# EAGLE board Qwiic Solid State Relay-Panel (EAGLE 9.6.0)
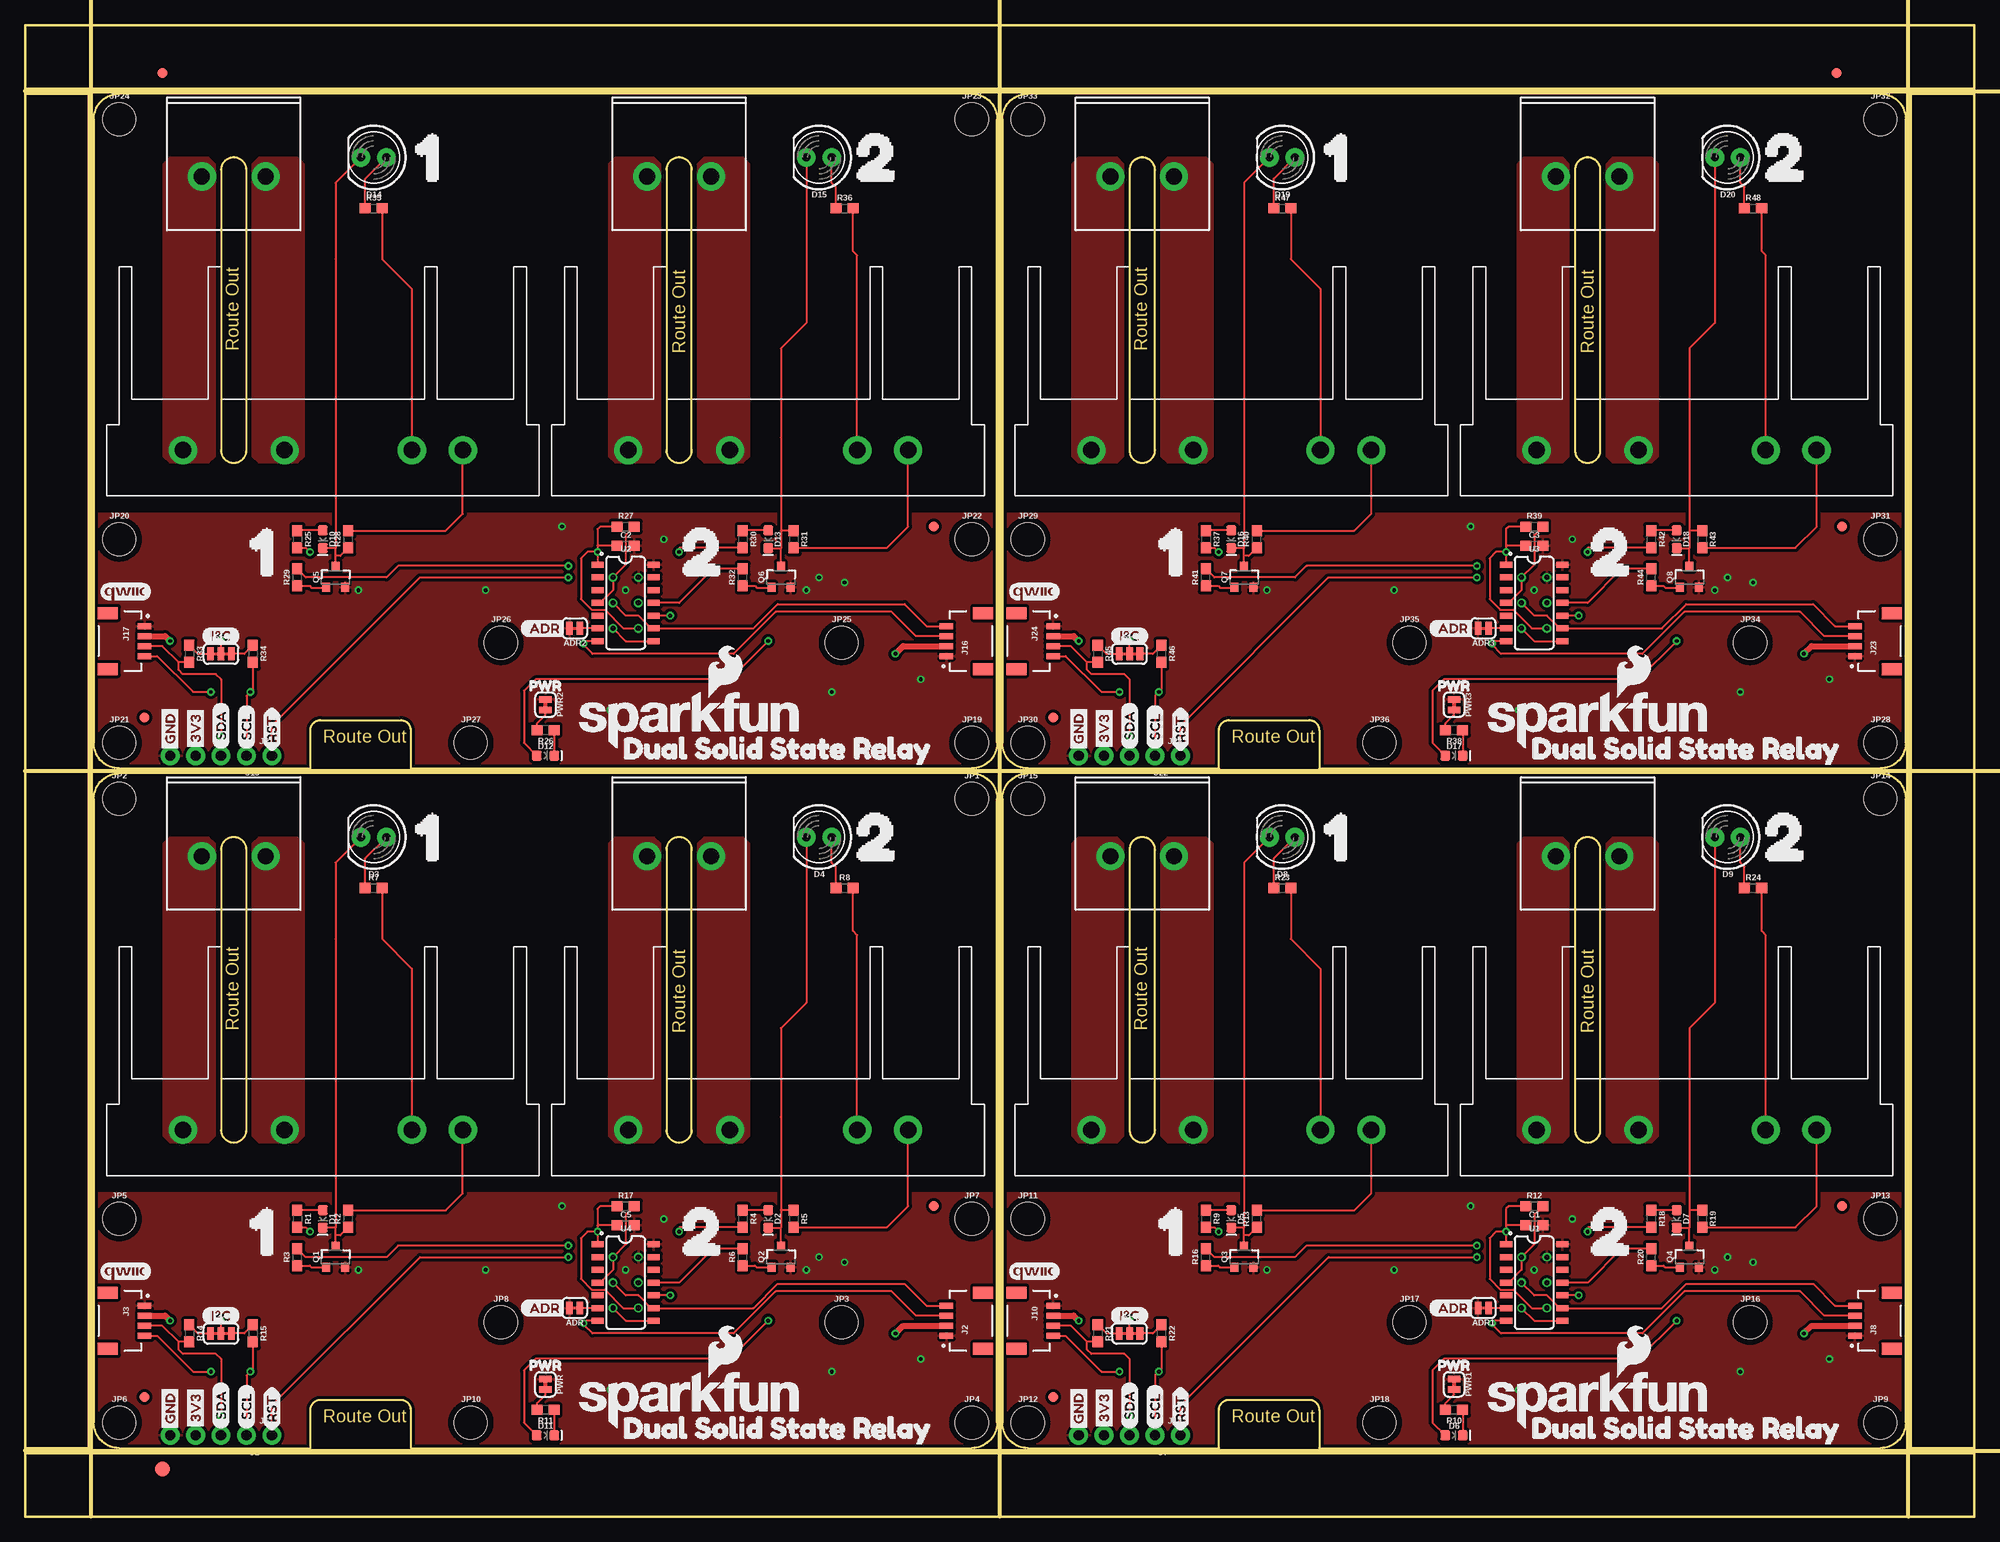
[diagram p0: board, top side]
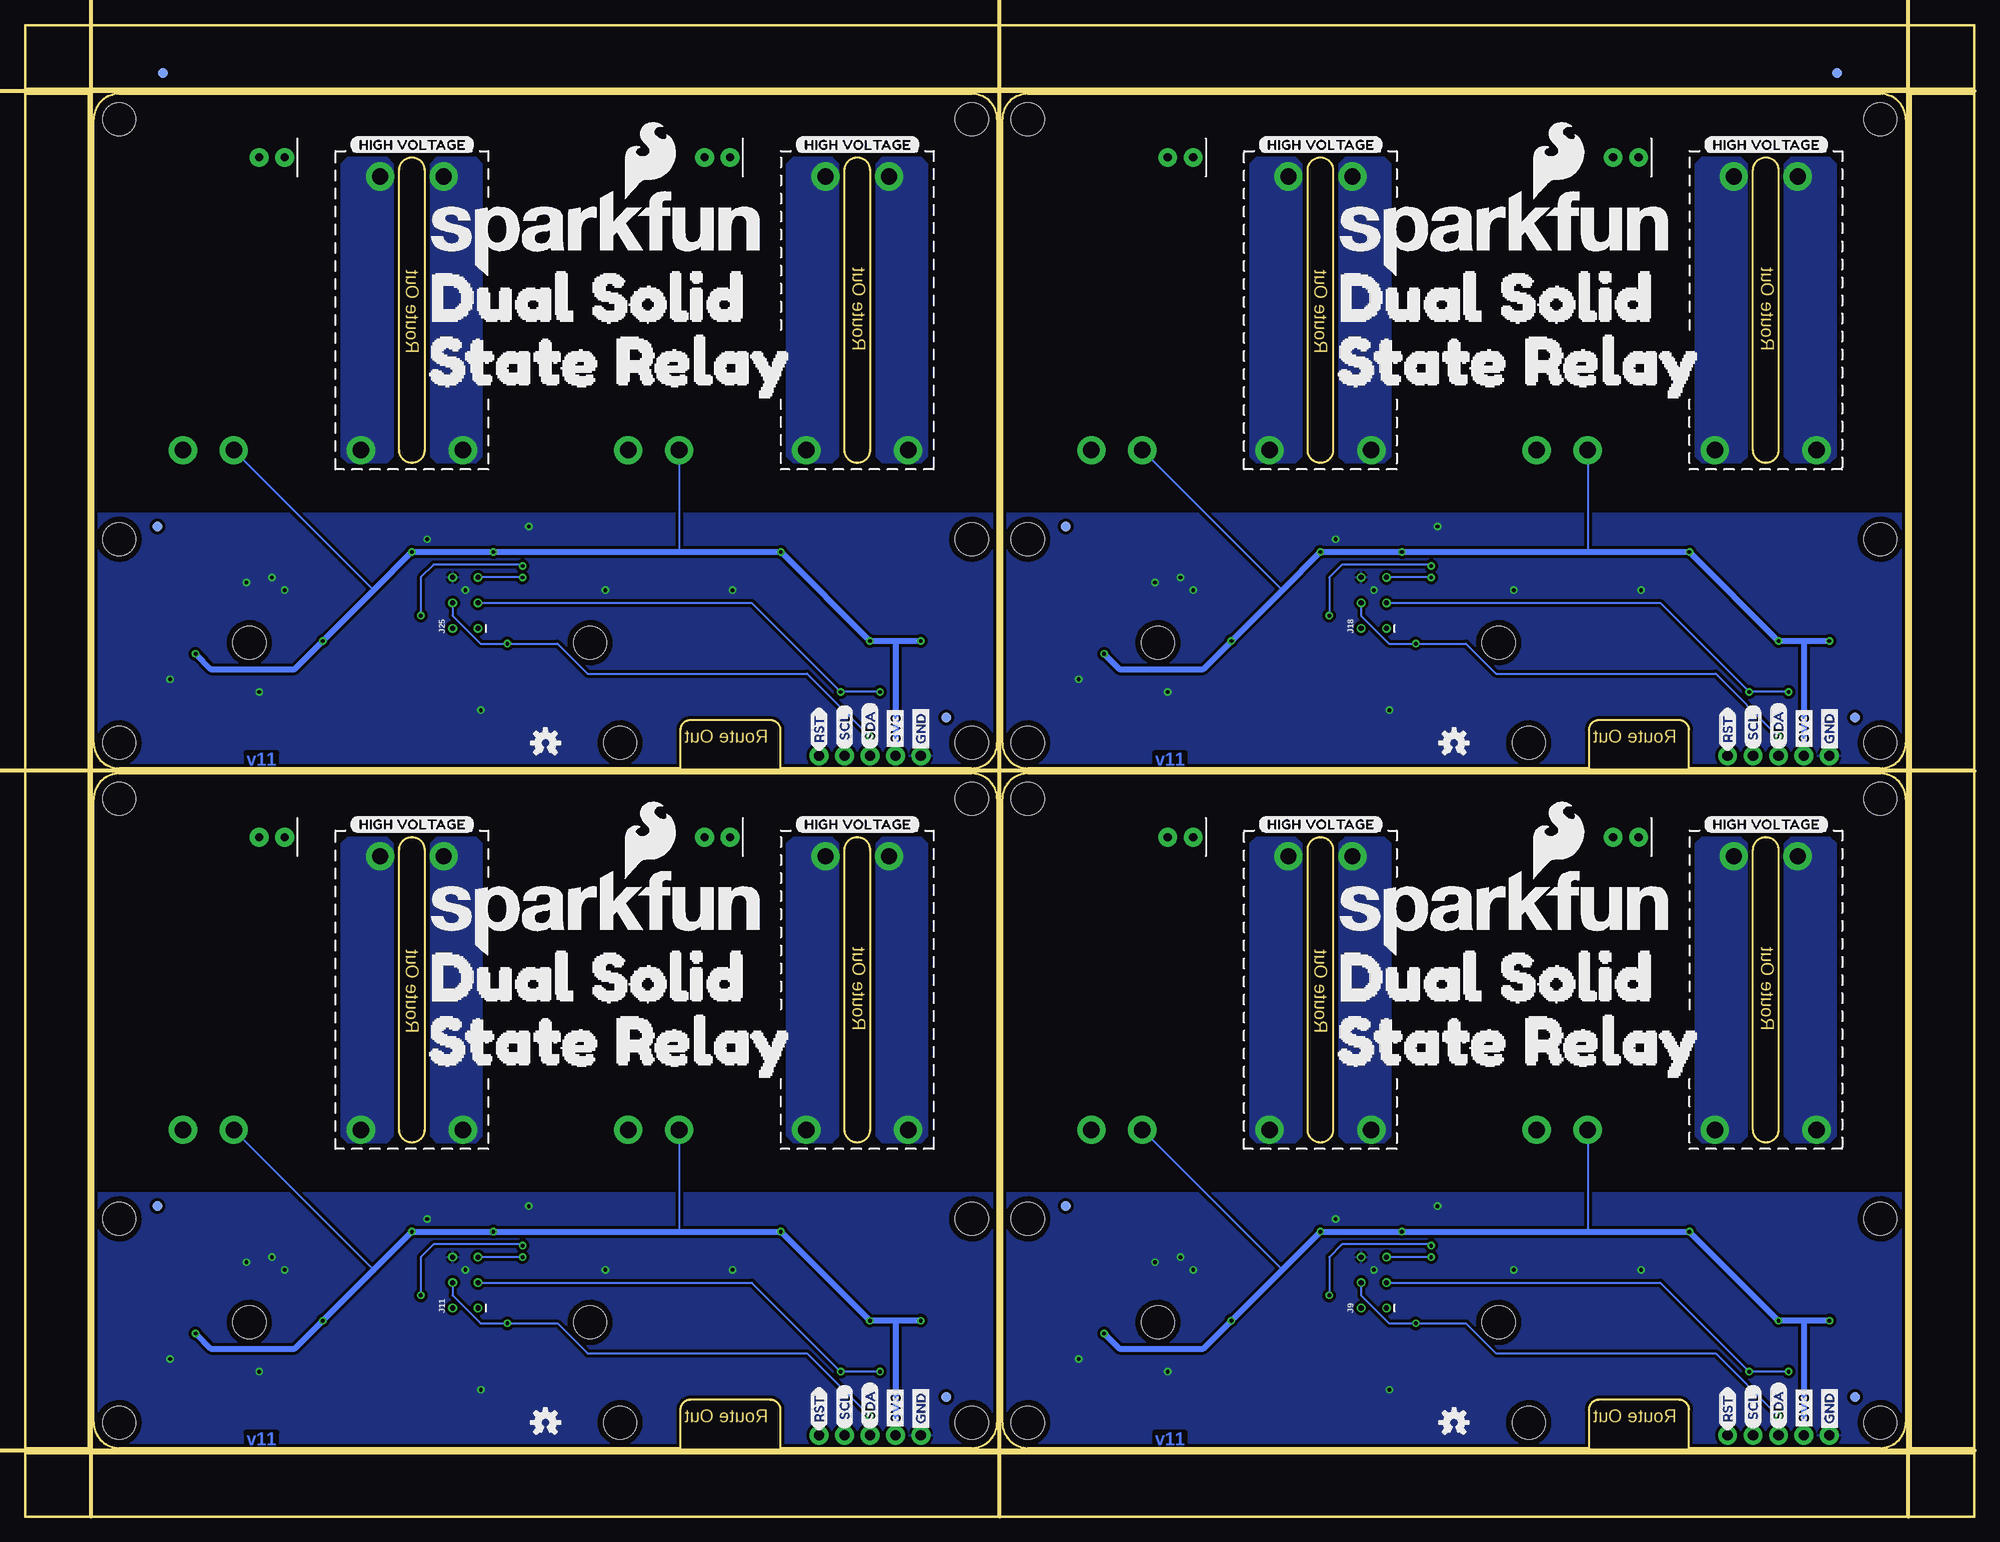
[diagram p1: board, bottom side, seen from below]

Size 194.56 x 148.84 mm. Coordinates in mm from the lower left corner, seen from the top.
Outline: 9.4,6.86 28.49,6.86 28.49,10.67 arc-90 29.49,11.67 37.49,11.67 arc-90 38.49,10.67 38.49,6.86 94.49,6.86 arc90 97.03,9.4 97.03,71.63 arc90 94.49,74.17 9.4,74.17 arc90 6.86,71.63 6.86,9.4 arc90 9.4,6.86
Outline: 20.83,67.82 arc90 19.56,66.55 19.56,38.61 arc90 20.83,37.34 arc90 22.1,38.61 22.1,66.55 arc90 20.83,67.82
Outline: 65.28,37.34 arc90 66.55,38.61 66.55,66.55 arc90 65.28,67.82 arc90 64.01,66.55 64.01,38.61 arc90 65.28,37.34
Outline: 100.08,6.86 119.17,6.86 119.17,10.67 arc-90 120.17,11.67 128.17,11.67 arc-90 129.17,10.67 129.17,6.86 185.17,6.86 arc90 187.71,9.4 187.71,71.63 arc90 185.17,74.17 100.08,74.17 arc90 97.54,71.63 97.54,9.4 arc90 100.08,6.86
Outline: 111.51,67.82 arc90 110.24,66.55 110.24,38.61 arc90 111.51,37.34 arc90 112.78,38.61 112.78,66.55 arc90 111.51,67.82
Outline: 155.96,37.34 arc90 157.23,38.61 157.23,66.55 arc90 155.96,67.82 arc90 154.69,66.55 154.69,38.61 arc90 155.96,37.34
Outline: 9.4,74.68 28.49,74.68 28.49,78.49 arc-90 29.49,79.49 37.49,79.49 arc-90 38.49,78.49 38.49,74.68 94.49,74.68 arc90 97.03,77.22 97.03,139.45 arc90 94.49,141.99 9.4,141.99 arc90 6.86,139.45 6.86,77.22 arc90 9.4,74.68
Outline: 20.83,135.64 arc90 19.56,134.37 19.56,106.43 arc90 20.83,105.16 arc90 22.1,106.43 22.1,134.37 arc90 20.83,135.64
Outline: 65.28,105.16 arc90 66.55,106.43 66.55,134.37 arc90 65.28,135.64 arc90 64.01,134.37 64.01,106.43 arc90 65.28,105.16
Outline: 100.08,74.68 119.17,74.68 119.17,78.49 arc-90 120.17,79.49 128.17,79.49 arc-90 129.17,78.49 129.17,74.68 185.17,74.68 arc90 187.71,77.22 187.71,139.45 arc90 185.17,141.99 100.08,141.99 arc90 97.54,139.45 97.54,77.22 arc90 100.08,74.68
Outline: 111.51,135.64 arc90 110.24,134.37 110.24,106.43 arc90 111.51,105.16 arc90 112.78,106.43 112.78,134.37 arc90 111.51,135.64
Outline: 155.96,105.16 arc90 157.23,106.43 157.23,134.37 arc90 155.96,135.64 arc90 154.69,134.37 154.69,106.43 arc90 155.96,105.16
Outline: 0,6.35 194.56,6.35 194.56,0 0,0 0,6.35
Outline: 188.21,141.99 194.56,141.99 194.56,6.86 188.21,6.86 188.21,141.99
Outline: 0,148.84 194.56,148.84 194.56,142.49 0,142.49 0,148.84
Outline: 0,141.99 6.35,141.99 6.35,6.86 0,6.86 0,141.99
Copper layers (1*16): Top 0.035mm / dielectric 1.5mm / Bottom 0.035mm
Design rules "Qwiic": minimum track width 7mil, minimum drill 15mil, track to track 7mil, track to pad 7mil, pad to pad 7mil, via to via 7mil, smd to smd 7mil, copper to edge 7mil, drill to drill 7mil, minimum pad ring 7mil, minimum via ring 7mil, stop-mask expansion 4mil, vias tented up to drill 25mil, thermal gap 10mil
Milling: 6 lines

## Footprints (pad centres in the part's own frame; a part is rotated, then mirrored left to right if it is on the bottom)
SMT-JUMPER_2_NC_TRACE_SILK = smd 0.66 x 1.27: 1 -0.521,0; 2 0.521,0
0603 = smd 1.1 x 1: 1 -0.85,0; 2 0.85,0
LED-0603 = smd 1 x 1: A -0.877,0; C 0.877,0
LED_5MM = drill 0.813 pad 1.88: A -1.27,0; K 1.27,0
FIDUCIAL-1X2 = smd 1 x 1: 1 0,0
FIDUCIAL-1.5X3 = smd 1.5 x 1.5: 1 0,0
SMT-JUMPER_3_2-NC_TRACE_SILK = smd 0.66 x 1.27: 1 -1.041,0; 2 0,0; 3 1.041,0
1X04_NO_SILK = drill 1.016 pad 1.88: 1 0,0; 2 2.54,0; 3 5.08,0; 4 7.62,0
JST04_1MM_RA = smd 0.6 x 1.35: 1 -1.5,0; 2 -0.5,0; 3 0.5,0; 4 1.5,0 | smd 1.2 x 2: NC1 2.8,-3.675; NC2 -2.8,-3.675
1X02_6.35_SCREWTERM = drill 1.6 pad 2.8: P1 -3.175,0; P2 3.175,0
1X01_NO_SILK = drill 1.016 pad 1.88: 1 0,0
2X3_TEST_POINTS = drill 0.508: 1 -2.54,-1.27; 2 -2.54,1.27; 3 0,-1.27; 4 0,1.27; 5 2.54,-1.27; 6 2.54,1.27
STAND-OFF = hole 3.302: 0,0
PTH_SOLIDSTATERELAY = drill 1.651 pad 2.819: 1 0,0; 2 10.16,0; 3 22.86,0; 4 27.94,0
SOT23-3 = smd 0.8 x 0.9: 1 -0.95,-1; 2 0.95,-1; 3 0,1.1
SO14 = smd 0.6 x 1.2: 1 -3.81,-2.8; 2 -2.54,-2.8; 3 -1.27,-2.8; 4 0,-2.8; 5 1.27,-2.8; 6 2.54,-2.8; 7 3.81,-2.8; 8 3.81,2.8; 9 2.54,2.8; 10 1.27,2.8; 11 0,2.8; 12 -1.27,2.8; 13 -2.54,2.8; 14 -3.81,2.8

## Placement (x,y rotation side)
ADR  JUMPER-SMT_2_NC_TRACE_SILK  [SMT-JUMPER_2_NC_TRACE_SILK]  54.86,20.83 180 top
ADR1  JUMPER-SMT_2_NC_TRACE_SILK  [SMT-JUMPER_2_NC_TRACE_SILK]  145.54,20.83 180 top
ADR2  JUMPER-SMT_2_NC_TRACE_SILK  [SMT-JUMPER_2_NC_TRACE_SILK]  54.86,88.65 180 top
ADR3  JUMPER-SMT_2_NC_TRACE_SILK  [SMT-JUMPER_2_NC_TRACE_SILK]  145.54,88.65 180 top
C1  0.1uF  [0603]  150.62,29.08 0 top
C2  0.1uF  [0603]  59.94,96.9 0 top
C3  0.1uF  [0603]  150.62,96.9 0 top
C5  0.1uF  [0603]  59.94,29.08 0 top
D1  BLUE  [LED-0603]  29.72,29.72 270 top
D2  BLUE  [LED-0603]  74.17,29.72 270 top
D3  [LED_5MM]  34.8,67.82 180 top
D4  [LED_5MM]  79.25,67.82 180 top
D5  BLUE  [LED-0603]  120.4,29.72 270 top
D6  RED  [LED-0603]  142.62,8.13 0 top
D7  BLUE  [LED-0603]  164.85,29.72 270 top
D8  [LED_5MM]  125.48,67.82 180 top
D9  [LED_5MM]  169.93,67.82 180 top
D10  BLUE  [LED-0603]  29.72,97.54 270 top
D11  RED  [LED-0603]  51.94,8.13 0 top
D12  RED  [LED-0603]  51.94,75.95 0 top
D13  BLUE  [LED-0603]  74.17,97.54 270 top
D14  [LED_5MM]  34.8,135.64 180 top
D15  [LED_5MM]  79.25,135.64 180 top
D16  BLUE  [LED-0603]  120.4,97.54 270 top
D17  RED  [LED-0603]  142.62,75.95 0 top
D18  BLUE  [LED-0603]  164.85,97.54 270 top
D19  [LED_5MM]  125.48,135.64 180 top
D20  [LED_5MM]  169.93,135.64 180 top
E$1  [FIDUCIAL-1X2]  13.72,144.08 0 top
E$2  [FIDUCIAL-1X2]  13.72,144.08 0 bottom
E$3  [FIDUCIAL-1X2]  180.78,144.08 0 top
E$4  [FIDUCIAL-1X2]  180.78,144.08 0 bottom
E$5  [FIDUCIAL-1.5X3]  13.72,4.76 0 top
FD1  FIDUCIAL1X2  [FIDUCIAL-1X2]  90.68,30.99 0 top
FD2  FIDUCIAL1X2  [FIDUCIAL-1X2]  90.68,30.99 0 bottom
FD3  FIDUCIAL1X2  [FIDUCIAL-1X2]  11.94,11.94 0 bottom
FD4  FIDUCIAL1X2  [FIDUCIAL-1X2]  11.94,11.94 0 top
FD5  FIDUCIAL1X2  [FIDUCIAL-1X2]  181.36,30.99 0 top
FD6  FIDUCIAL1X2  [FIDUCIAL-1X2]  181.36,30.99 0 bottom
FD7  FIDUCIAL1X2  [FIDUCIAL-1X2]  102.62,11.94 0 bottom
FD8  FIDUCIAL1X2  [FIDUCIAL-1X2]  102.62,11.94 0 top
FD9  FIDUCIAL1X2  [FIDUCIAL-1X2]  90.68,98.81 0 top
FD10  FIDUCIAL1X2  [FIDUCIAL-1X2]  90.68,98.81 0 bottom
FD11  FIDUCIAL1X2  [FIDUCIAL-1X2]  11.94,79.76 0 bottom
FD12  FIDUCIAL1X2  [FIDUCIAL-1X2]  11.94,79.76 0 top
FD13  FIDUCIAL1X2  [FIDUCIAL-1X2]  181.36,98.81 0 top
FD14  FIDUCIAL1X2  [FIDUCIAL-1X2]  181.36,98.81 0 bottom
FD15  FIDUCIAL1X2  [FIDUCIAL-1X2]  102.62,79.76 0 bottom
FD16  FIDUCIAL1X2  [FIDUCIAL-1X2]  102.62,79.76 0 top
I2C  JUMPER-SMT_3_2-NC_TRACE_SILK  [SMT-JUMPER_3_2-NC_TRACE_SILK]  19.56,18.29 0 top
I2C1  JUMPER-SMT_3_2-NC_TRACE_SILK  [SMT-JUMPER_3_2-NC_TRACE_SILK]  110.24,18.29 0 top
I2C2  JUMPER-SMT_3_2-NC_TRACE_SILK  [SMT-JUMPER_3_2-NC_TRACE_SILK]  19.56,86.11 0 top
I2C3  JUMPER-SMT_3_2-NC_TRACE_SILK  [SMT-JUMPER_3_2-NC_TRACE_SILK]  110.24,86.11 0 top
J1  [1X04_NO_SILK]  22.1,8.13 180 top
J2  Qwiic Right Angle  [JST04_1MM_RA]  91.95,19.56 90 top
J3  Qwiic Right Angle  [JST04_1MM_RA]  11.94,19.56 270 top
J4  [1X02_6.35_SCREWTERM]  20.83,65.91 180 top
J5  [1X02_6.35_SCREWTERM]  65.28,65.91 180 top
J6  [1X01_NO_SILK]  24.64,8.13 0 top
J7  [1X04_NO_SILK]  112.78,8.13 180 top
J8  Qwiic Right Angle  [JST04_1MM_RA]  182.63,19.56 90 top
J9  AVR_SPI_PROG_3X2TESTPOINTS  [2X3_TEST_POINTS]  59.94,23.37 90 bottom
J10  Qwiic Right Angle  [JST04_1MM_RA]  102.62,19.56 270 top
J11  AVR_SPI_PROG_3X2TESTPOINTS  [2X3_TEST_POINTS]  150.62,23.37 90 bottom
J12  [1X02_6.35_SCREWTERM]  111.51,65.91 180 top
J13  [1X02_6.35_SCREWTERM]  155.96,65.91 180 top
J14  [1X01_NO_SILK]  115.32,8.13 0 top
J15  [1X04_NO_SILK]  22.1,75.95 180 top
J16  Qwiic Right Angle  [JST04_1MM_RA]  91.95,87.38 90 top
J17  Qwiic Right Angle  [JST04_1MM_RA]  11.94,87.38 270 top
J18  AVR_SPI_PROG_3X2TESTPOINTS  [2X3_TEST_POINTS]  59.94,91.19 90 bottom
J19  [1X02_6.35_SCREWTERM]  20.83,133.73 180 top
J20  [1X02_6.35_SCREWTERM]  65.28,133.73 180 top
J21  [1X01_NO_SILK]  24.64,75.95 0 top
J22  [1X04_NO_SILK]  112.78,75.95 180 top
J23  Qwiic Right Angle  [JST04_1MM_RA]  182.63,87.38 90 top
J24  Qwiic Right Angle  [JST04_1MM_RA]  102.62,87.38 270 top
J25  AVR_SPI_PROG_3X2TESTPOINTS  [2X3_TEST_POINTS]  150.62,91.19 90 bottom
J26  [1X02_6.35_SCREWTERM]  111.51,133.73 180 top
J27  [1X02_6.35_SCREWTERM]  155.96,133.73 180 top
J28  [1X01_NO_SILK]  115.32,75.95 0 top
JP1  STAND-OFF  [STAND-OFF]  94.49,71.63 0 top
JP2  STAND-OFF  [STAND-OFF]  9.4,71.63 0 top
JP3  STAND-OFF  [STAND-OFF]  81.49,19.4 0 top
JP4  STAND-OFF  [STAND-OFF]  94.49,9.4 0 top
JP5  STAND-OFF  [STAND-OFF]  9.4,29.72 0 top
JP6  STAND-OFF  [STAND-OFF]  9.4,9.4 0 top
JP7  STAND-OFF  [STAND-OFF]  94.49,29.72 0 top
JP8  STAND-OFF  [STAND-OFF]  47.49,19.4 0 top
JP9  STAND-OFF  [STAND-OFF]  185.17,9.4 0 top
JP10  STAND-OFF  [STAND-OFF]  44.49,9.4 0 top
JP11  STAND-OFF  [STAND-OFF]  100.08,29.72 0 top
JP12  STAND-OFF  [STAND-OFF]  100.08,9.4 0 top
JP13  STAND-OFF  [STAND-OFF]  185.17,29.72 0 top
JP14  STAND-OFF  [STAND-OFF]  185.17,71.63 0 top
JP15  STAND-OFF  [STAND-OFF]  100.08,71.63 0 top
JP16  STAND-OFF  [STAND-OFF]  172.17,19.4 0 top
JP17  STAND-OFF  [STAND-OFF]  138.17,19.4 0 top
JP18  STAND-OFF  [STAND-OFF]  135.17,9.4 0 top
JP19  STAND-OFF  [STAND-OFF]  94.49,77.22 0 top
JP20  STAND-OFF  [STAND-OFF]  9.4,97.54 0 top
JP21  STAND-OFF  [STAND-OFF]  9.4,77.22 0 top
JP22  STAND-OFF  [STAND-OFF]  94.49,97.54 0 top
JP23  STAND-OFF  [STAND-OFF]  94.49,139.45 0 top
JP24  STAND-OFF  [STAND-OFF]  9.4,139.45 0 top
JP25  STAND-OFF  [STAND-OFF]  81.49,87.22 0 top
JP26  STAND-OFF  [STAND-OFF]  47.49,87.22 0 top
JP27  STAND-OFF  [STAND-OFF]  44.49,77.22 0 top
JP28  STAND-OFF  [STAND-OFF]  185.17,77.22 0 top
JP29  STAND-OFF  [STAND-OFF]  100.08,97.54 0 top
JP30  STAND-OFF  [STAND-OFF]  100.08,77.22 0 top
JP31  STAND-OFF  [STAND-OFF]  185.17,97.54 0 top
JP32  STAND-OFF  [STAND-OFF]  185.17,139.45 0 top
JP33  STAND-OFF  [STAND-OFF]  100.08,139.45 0 top
JP34  STAND-OFF  [STAND-OFF]  172.17,87.22 0 top
JP35  STAND-OFF  [STAND-OFF]  138.17,87.22 0 top
JP36  STAND-OFF  [STAND-OFF]  135.17,77.22 0 top
K1  25A Solid State Relay  [PTH_SOLIDSTATERELAY]  15.75,38.61 0 top
K2  25A Solid State Relay  [PTH_SOLIDSTATERELAY]  60.2,38.61 0 top
K3  25A Solid State Relay  [PTH_SOLIDSTATERELAY]  106.43,38.61 0 top
K4  25A Solid State Relay  [PTH_SOLIDSTATERELAY]  150.88,38.61 0 top
K5  25A Solid State Relay  [PTH_SOLIDSTATERELAY]  15.75,106.43 0 top
K6  25A Solid State Relay  [PTH_SOLIDSTATERELAY]  60.2,106.43 0 top
K7  25A Solid State Relay  [PTH_SOLIDSTATERELAY]  106.43,106.43 0 top
K8  25A Solid State Relay  [PTH_SOLIDSTATERELAY]  150.88,106.43 0 top
LOGO1  SFE_LOGO_NAME_FLAME.2_INCH  [SFE_LOGO_NAME_FLAME_.2]  66.34,11.67 0 top
LOGO2  OSHW-LOGOS  [OSHW-LOGO-S]  51.94,9.4 0 bottom
LOGO3  SFE_LOGO_NAME_FLAME.3_INCH  [SFE_LOGO_NAME_FLAME_.3]  46.99,60.2 0 bottom
LOGO4  QWIIC_LOGO_5MM  [QWIIC_5MM]  10.03,24.51 0 top
LOGO5  OSHW-LOGOS  [OSHW-LOGO-S]  142.62,9.4 0 bottom
LOGO6  SFE_LOGO_NAME_FLAME.2_INCH  [SFE_LOGO_NAME_FLAME_.2]  157.02,11.67 0 top
LOGO7  SFE_LOGO_NAME_FLAME.3_INCH  [SFE_LOGO_NAME_FLAME_.3]  137.67,60.2 0 bottom
LOGO8  QWIIC_LOGO_5MM  [QWIIC_5MM]  100.71,24.51 0 top
LOGO9  OSHW-LOGOS  [OSHW-LOGO-S]  51.94,77.22 0 bottom
LOGO10  SFE_LOGO_NAME_FLAME.2_INCH  [SFE_LOGO_NAME_FLAME_.2]  66.34,79.49 0 top
LOGO11  SFE_LOGO_NAME_FLAME.3_INCH  [SFE_LOGO_NAME_FLAME_.3]  46.99,128.02 0 bottom
LOGO12  QWIIC_LOGO_5MM  [QWIIC_5MM]  10.03,92.33 0 top
LOGO13  OSHW-LOGOS  [OSHW-LOGO-S]  142.62,77.22 0 bottom
LOGO14  SFE_LOGO_NAME_FLAME.2_INCH  [SFE_LOGO_NAME_FLAME_.2]  157.02,79.49 0 top
LOGO15  SFE_LOGO_NAME_FLAME.3_INCH  [SFE_LOGO_NAME_FLAME_.3]  137.67,128.02 0 bottom
LOGO16  QWIIC_LOGO_5MM  [QWIIC_5MM]  100.71,92.33 0 top
PWR  JUMPER-SMT_2_NC_TRACE_SILK  [SMT-JUMPER_2_NC_TRACE_SILK]  51.94,13.21 270 top
PWR1  JUMPER-SMT_2_NC_TRACE_SILK  [SMT-JUMPER_2_NC_TRACE_SILK]  142.62,13.21 270 top
PWR2  JUMPER-SMT_2_NC_TRACE_SILK  [SMT-JUMPER_2_NC_TRACE_SILK]  51.94,81.03 270 top
PWR3  JUMPER-SMT_2_NC_TRACE_SILK  [SMT-JUMPER_2_NC_TRACE_SILK]  142.62,81.03 270 top
Q1  600mA/40V  [SOT23-3]  30.99,25.91 0 top
Q2  600mA/40V  [SOT23-3]  75.44,25.91 0 top
Q3  600mA/40V  [SOT23-3]  121.67,25.91 0 top
Q4  600mA/40V  [SOT23-3]  166.12,25.91 0 top
Q5  600mA/40V  [SOT23-3]  30.99,93.73 0 top
Q6  600mA/40V  [SOT23-3]  75.44,93.73 0 top
Q7  600mA/40V  [SOT23-3]  121.67,93.73 0 top
Q8  600mA/40V  [SOT23-3]  166.12,93.73 0 top
R1  1k  [0603]  27.18,29.72 270 top
R2  47  [0603]  32.26,29.72 90 top
R3  1k  [0603]  27.18,25.91 90 top
R4  1k  [0603]  71.63,29.72 270 top
R5  47  [0603]  76.71,29.72 270 top
R6  1k  [0603]  71.63,25.91 90 top
R7  1k  [0603]  34.8,62.74 0 top
R8  1k  [0603]  81.79,62.74 0 top
R9  1k  [0603]  117.86,29.72 270 top
R10  1k  [0603]  142.62,10.67 180 top
R11  1k  [0603]  51.94,10.67 180 top
R12  4.7k  [0603]  150.62,30.99 0 top
R13  47  [0603]  122.94,29.72 90 top
R14  4.7k  [0603]  16.38,18.29 270 top
R15  4.7k  [0603]  22.73,18.29 270 top
R16  1k  [0603]  117.86,25.91 90 top
R17  4.7k  [0603]  59.94,30.99 0 top
R18  1k  [0603]  162.31,29.72 270 top
R19  47  [0603]  167.39,29.72 270 top
R20  1k  [0603]  162.31,25.91 90 top
R21  4.7k  [0603]  107.06,18.29 270 top
R22  4.7k  [0603]  113.41,18.29 270 top
R23  1k  [0603]  125.48,62.74 0 top
R24  1k  [0603]  172.47,62.74 0 top
R25  1k  [0603]  27.18,97.54 270 top
R26  1k  [0603]  51.94,78.49 180 top
R27  4.7k  [0603]  59.94,98.81 0 top
R28  47  [0603]  32.26,97.54 90 top
R29  1k  [0603]  27.18,93.73 90 top
R30  1k  [0603]  71.63,97.54 270 top
R31  47  [0603]  76.71,97.54 270 top
R32  1k  [0603]  71.63,93.73 90 top
R33  4.7k  [0603]  16.38,86.11 270 top
R34  4.7k  [0603]  22.73,86.11 270 top
R35  1k  [0603]  34.8,130.56 0 top
R36  1k  [0603]  81.79,130.56 0 top
R37  1k  [0603]  117.86,97.54 270 top
R38  1k  [0603]  142.62,78.49 180 top
R39  4.7k  [0603]  150.62,98.81 0 top
R40  47  [0603]  122.94,97.54 90 top
R41  1k  [0603]  117.86,93.73 90 top
R42  1k  [0603]  162.31,97.54 270 top
R43  47  [0603]  167.39,97.54 270 top
R44  1k  [0603]  162.31,93.73 90 top
R45  4.7k  [0603]  107.06,86.11 270 top
R46  4.7k  [0603]  113.41,86.11 270 top
R47  1k  [0603]  125.48,130.56 0 top
R48  1k  [0603]  172.47,130.56 0 top
U1  ATTINY84-ARDUINO  [SO14]  150.62,23.37 270 top
U2  ATTINY84-ARDUINO  [SO14]  59.94,91.19 270 top
U3  ATTINY84-ARDUINO  [SO14]  150.62,91.19 270 top
U4  ATTINY84-ARDUINO  [SO14]  59.94,23.37 270 top
U$1  [DUAL_SOLID_STATE_RELAY0]  57.86,8.86 0 top
U$2  [DUAL_SOLID0]  67.56,53.85 0 bottom
U$3  [STATE_RELAY1]  67.69,47.5 0 bottom
U$4  [11]  108.97,28.45 0 top
U$5  [11]  18.29,28.45 0 top
U$6  [22]  61.47,28.45 0 top
U$7  [HIGH_VOLTAGE0]  27.05,69.09 0 bottom
U$8  [HIGH_VOLTAGE0]  71.5,69.09 0 bottom
U$9  [11]  34.8,67.82 0 top
U$10  [22]  78.87,67.82 0 top
U$11  [RST_I]  24.64,8.51 90 top
U$12  [RST_I]  24.64,8.51 90 bottom
U$13  [GND_P]  14.48,8.38 90 top
U$14  [GND_P]  14.48,8.38 90 bottom
U$15  [I2C]  17.65,20.07 0 top
U$16  [3V3_P]  17.02,8.51 90 top
U$17  [3V3_P]  17.02,8.51 90 bottom
U$18  [SCL_IO]  22.1,8.76 90 top
U$19  [SCL_IO]  22.1,8.76 90 bottom
U$20  [SDA_IO]  19.56,8.76 90 top
U$21  [SDA_IO]  19.56,8.76 90 bottom
U$22  [22]  152.15,28.45 0 top
U$23  [ADR3]  49.4,20.83 0 top
U$24  [PWR_TO]  49.4,15.11 0 top
U$25  [11]  125.48,67.82 0 top
U$26  [22]  169.55,67.82 0 top
U$27  [GND_P]  105.16,8.38 90 top
U$28  [GND_P]  105.16,8.38 90 bottom
U$29  [I2C]  108.33,20.07 0 top
U$30  [3V3_P]  107.7,8.51 90 top
U$31  [3V3_P]  107.7,8.51 90 bottom
U$32  [SCL_IO]  112.78,8.76 90 top
U$33  [SCL_IO]  112.78,8.76 90 bottom
U$34  [SDA_IO]  110.24,8.76 90 top
U$35  [SDA_IO]  110.24,8.76 90 bottom
U$36  [ADR3]  140.08,20.83 0 top
U$37  [PWR_TO]  140.08,15.11 0 top
U$38  [DUAL_SOLID0]  158.24,53.85 0 bottom
U$39  [STATE_RELAY1]  158.37,47.5 0 bottom
U$40  [HIGH_VOLTAGE0]  117.73,69.09 0 bottom
U$41  [HIGH_VOLTAGE0]  162.18,69.09 0 bottom
U$42  [RST_I]  115.32,8.51 90 top
U$43  [RST_I]  115.32,8.51 90 bottom
U$44  [DUAL_SOLID_STATE_RELAY0]  148.54,8.86 0 top
U$45  [11]  18.29,96.27 0 top
U$46  [22]  61.47,96.27 0 top
U$47  [11]  34.8,135.64 0 top
U$48  [22]  78.87,135.64 0 top
U$49  [GND_P]  14.48,76.2 90 top
U$50  [GND_P]  14.48,76.2 90 bottom
U$51  [I2C]  17.65,87.88 0 top
U$52  [3V3_P]  17.02,76.33 90 top
U$53  [3V3_P]  17.02,76.33 90 bottom
U$54  [SCL_IO]  22.1,76.58 90 top
U$55  [SCL_IO]  22.1,76.58 90 bottom
U$56  [SDA_IO]  19.56,76.58 90 top
U$57  [SDA_IO]  19.56,76.58 90 bottom
U$58  [ADR3]  49.4,88.65 0 top
U$59  [PWR_TO]  49.4,82.93 0 top
U$60  [DUAL_SOLID0]  67.56,121.67 0 bottom
U$61  [STATE_RELAY1]  67.69,115.32 0 bottom
U$62  [HIGH_VOLTAGE0]  27.05,136.91 0 bottom
U$63  [HIGH_VOLTAGE0]  71.5,136.91 0 bottom
U$64  [RST_I]  24.64,76.33 90 top
U$65  [RST_I]  24.64,76.33 90 bottom
U$66  [DUAL_SOLID_STATE_RELAY0]  57.86,76.68 0 top
U$67  [11]  108.97,96.27 0 top
U$68  [22]  152.15,96.27 0 top
U$69  [11]  125.48,135.64 0 top
U$70  [22]  169.55,135.64 0 top
U$71  [GND_P]  105.16,76.2 90 top
U$72  [GND_P]  105.16,76.2 90 bottom
U$73  [I2C]  108.33,87.88 0 top
U$74  [3V3_P]  107.7,76.33 90 top
U$75  [3V3_P]  107.7,76.33 90 bottom
U$76  [SCL_IO]  112.78,76.58 90 top
U$77  [SCL_IO]  112.78,76.58 90 bottom
U$78  [SDA_IO]  110.24,76.58 90 top
U$79  [SDA_IO]  110.24,76.58 90 bottom
U$80  [ADR3]  140.08,88.65 0 top
U$81  [PWR_TO]  140.08,82.93 0 top
U$82  [DUAL_SOLID0]  158.24,121.67 0 bottom
U$83  [STATE_RELAY1]  158.37,115.32 0 bottom
U$84  [HIGH_VOLTAGE0]  117.73,136.91 0 bottom
U$85  [HIGH_VOLTAGE0]  162.18,136.91 0 bottom
U$86  [RST_I]  115.32,76.33 90 top
U$87  [RST_I]  115.32,76.33 90 bottom
U$88  [DUAL_SOLID_STATE_RELAY0]  148.54,76.68 0 top

## Library data of the parts
ADR ADR1-ADR3 I2C I2C1-I2C3 PWR PWR1-PWR3 = SparkFun-Jumpers
C1-C3 C5 = SparkFun-Capacitors; PROD_ID: CAP-00810
D1 D2 D5 D7 D10 D13 D16 D18 = SparkFun-LED; PROD_ID: DIO-08575
D3 D4 D8 D9 D14 D15 D19 D20 = SparkFun-LED
D6 D11 D12 D17 = SparkFun-LED; PROD_ID: DIO-00819
E$1-E$4 FD1-FD16 LOGO1-LOGO16 = SparkFun-Aesthetics
E$5 = SparkFun-Retired
J1 J7 J15 J22 = SparkFun-Connectors; PROD_ID: CONN-09696
J2 J3 J8 J10 J16 J17 J23 J24 = SparkFun-Connectors; PROD_ID: CONN-13694
J4 J5 J12 J13 J19 J20 J26 J27 = SparkFun-Connectors; PROD_ID: CONN-15154
J6 J9 J11 J14 J18 J21 J25 J28 = SparkFun-Connectors
JP1-JP36 = SparkFun-Hardware
K1-K8 = SparkFun-DiscreteSemi; PROD_ID: COM-15155
Q1-Q8 = SparkFun-DiscreteSemi; PROD_ID: TRANS-08049
R1 R3 R4 R6-R11 R16 R18 R20 R23-R26 R29 R30 R32 R35-R38 R41 R42 R44 R47 R48 = SparkFun-Resistors; PROD_ID: RES-07856
R2 R5 R13 R19 R28 R31 R40 R43 = SparkFun-Resistors; PROD_ID: RES-14282
R12 R14 R15 R17 R21 R22 R27 R33 R34 R39 R45 R46 = SparkFun-Resistors; PROD_ID: RES-07857
U1-U4 = SparkFun-IC-Microcontroller; PROD_ID: IC-14155
U$1 U$44 U$66 U$88 = buzzard_labels (20)
U$2 U$3 U$38 U$39 U$60 U$61 U$82 U$83 = buzzard_labels (16)
U$4-U$6 U$9 U$10 U$22 U$25 U$26 U$45-U$48 U$67-U$70 = buzzard_labels (11)
U$7 U$8 U$40 U$41 U$62 U$63 U$84 U$85 = buzzard_labels (19)
U$11-U$21 U$24 U$27-U$35 U$37 U$42 U$43 U$49-U$57 U$59 U$64 U$65 U$71-U$79 U$81 U$86 U$87 = SparkFun-Buzzard
U$23 U$36 U$58 U$80 = buzzard_labels (13)

## Nets
3.3V: C5.1 D11.A I2C.2 J1.3 J2.2 J3.2 J9.2 K1.3 K2.3 R1.2 R4.2 R7.2 R8.2 R17.1 U4.1
3.3V1: C1.1 D6.A I2C1.2 J7.3 J8.2 J10.2 J11.2 K3.3 K4.3 R9.2 R12.1 R18.2 R23.2 R24.2 U1.1
3.3V2: C2.1 D12.A I2C2.2 J15.3 J16.2 J17.2 J18.2 K5.3 K6.3 R25.2 R27.1 R30.2 R35.2 R36.2 U2.1
3.3V3: C3.1 D17.A I2C3.2 J22.3 J23.2 J24.2 J25.2 K7.3 K8.3 R37.2 R39.1 R42.2 R47.2 R48.2 U3.1
!RESET: J6.1 J9.5 R17.2 U4.4
!RESET1: J11.5 J14.1 R12.2 U1.4
!RESET2: J18.5 J21.1 R27.2 U2.4
!RESET3: J25.5 J28.1 R39.2 U3.4
ADDR_JUMP: ADR.1 U4.6
ADDR_JUMP1: ADR1.1 U1.6
ADDR_JUMP2: ADR2.1 U2.6
ADDR_JUMP3: ADR3.1 U3.6
GND: ADR.2 C5.2 J1.4 J2.1 J3.1 J9.6 PWR.1 Q1.2 Q2.2 U4.14
GND1: ADR1.2 C1.2 J7.4 J8.1 J10.1 J11.6 PWR1.1 Q3.2 Q4.2 U1.14
GND2: ADR2.2 C2.2 J15.4 J16.1 J17.1 J18.6 PWR2.1 Q5.2 Q6.2 U2.14
GND3: ADR3.2 C3.2 J22.4 J23.1 J24.1 J25.6 PWR3.1 Q7.2 Q8.2 U3.14
MISO: J9.1 U4.8
MISO1: J11.1 U1.8
MISO2: J18.1 U2.8
MISO3: J25.1 U3.8
N$1: D6.C R10.1
N$2: PWR1.2 R10.2
N$3: K2.4 R5.2
N$4: D2.A R4.1
N$5: J4.P1 K1.2
N$6: J4.P2 K1.1
N$7: D1.A R1.1
N$8: J5.P1 K2.2
N$9: J5.P2 K2.1
N$10: K1.4 R2.2
N$11: D1.C D3.K Q1.3 R2.1
N$12: D3.A R7.1
N$13: D11.C R11.1
N$14: PWR.2 R11.2
N$15: I2C.3 R15.1
N$16: I2C.1 R14.1
N$17: D2.C D4.K Q2.3 R5.1
N$18: D4.A R8.1
N$19: K3.4 R13.2
N$20: D5.A R9.1
N$21: K4.4 R19.2
N$22: D7.A R18.1
N$23: I2C1.3 R22.1
N$24: I2C1.1 R21.1
N$25: J12.P1 K3.2
N$26: J12.P2 K3.1
N$27: J13.P1 K4.2
N$28: J13.P2 K4.1
N$29: D5.C D8.K Q3.3 R13.1
N$30: D8.A R23.1
N$31: D7.C D9.K Q4.3 R19.1
N$32: D9.A R24.1
N$33: D12.C R26.1
N$34: PWR2.2 R26.2
N$35: K5.4 R28.2
N$36: D10.A R25.1
N$37: K6.4 R31.2
N$38: D13.A R30.1
N$39: I2C2.3 R34.1
N$40: I2C2.1 R33.1
N$41: J19.P1 K5.2
N$42: J19.P2 K5.1
N$43: J20.P1 K6.2
N$44: J20.P2 K6.1
N$45: D10.C D14.K Q5.3 R28.1
N$46: D14.A R35.1
N$47: D13.C D15.K Q6.3 R31.1
N$48: D15.A R36.1
N$49: D17.C R38.1
N$50: PWR3.2 R38.2
N$51: K7.4 R40.2
N$52: D16.A R37.1
N$53: K8.4 R43.2
N$54: D18.A R42.1
N$55: I2C3.3 R46.1
N$56: I2C3.1 R45.1
N$57: J26.P1 K7.2
N$58: J26.P2 K7.1
N$59: J27.P1 K8.2
N$60: J27.P2 K8.1
N$61: D16.C D19.K Q7.3 R40.1
N$62: D19.A R47.1
N$63: D18.C D20.K Q8.3 R43.1
N$64: D20.A R48.1
OPTO_1: Q1.1 R3.1
OPTO_2: Q2.1 R6.1
OPTO_3: Q3.1 R16.1
OPTO_4: Q4.1 R20.1
OPTO_5: Q5.1 R29.1
OPTO_6: Q6.1 R32.1
OPTO_7: Q7.1 R41.1
OPTO_8: Q8.1 R44.1
RELAY_CTRL1: R3.2 U4.10
RELAY_CTRL2: R6.2 U4.11
RELAY_CTRL3: R16.2 U1.10
RELAY_CTRL4: R20.2 U1.11
RELAY_CTRL5: R29.2 U2.10
RELAY_CTRL6: R32.2 U2.11
RELAY_CTRL7: R41.2 U3.10
RELAY_CTRL8: R44.2 U3.11
SCL/SCK: J1.1 J2.4 J3.4 J9.3 R15.2 U4.9
SCL/SCK1: J7.1 J8.4 J10.4 J11.3 R22.2 U1.9
SCL/SCK2: J15.1 J16.4 J17.4 J18.3 R34.2 U2.9
SCL/SCK3: J22.1 J23.4 J24.4 J25.3 R46.2 U3.9
SDA/MOSI: J1.2 J2.3 J3.3 J9.4 R14.2 U4.7
SDA/MOSI1: J7.2 J8.3 J10.3 J11.4 R21.2 U1.7
SDA/MOSI2: J15.2 J16.3 J17.3 J18.4 R33.2 U2.7
SDA/MOSI3: J22.2 J23.3 J24.3 J25.4 R45.2 U3.7

## Tracks (layer width: path | path; a pad name or v marks a point on that pad's centre or on a via)
3.3V  (via drill 0.38)
  Top 0.178: R4.2 65.32,28.87 65.28,28.83 v65.28,28.45 | v57.14,28.45 56.13,28.45 55.5,27.81 55.5,23.74 56.57,22.66 57.87,22.66 59.71,20.83
  Top 0.203: R17.1 57.4,30.99 57.14,30.73 57.14,29.08 | 57.14,29.08 v57.14,28.45 U4.1 | C5.1 57.14,29.08 | 59.71,20.83 J9.2 | v74.17,19.56 70.36,15.75 50.94,15.75 49.8,14.61 49.8,9.4 D11.A | I2C.2 v19.56,19.56 | R7.2 35.65,57.66 38.61,54.7 K1.3 | R1.2 28.03,28.87 v28.45,28.45 | R8.2 82.64,58.46 83.06,58.04 K2.3
  Top 0.61: J3.2 13.98,20.06 v14.48,19.56 | v86.87,18.29 87.64,19.06 J2.2
  Bottom 0.203: K1.3 38.61,28.45 | K2.3 69.09,24.64
  Bottom 0.61: v14.48,19.56 17.02,19.56 | 17.02,19.56 v19.56,19.56 v28.45,28.45 38.61,28.45 v57.14,28.45 v65.28,28.45 69.09,24.64 v74.17,19.56 76.96,16.76 85.34,16.76 v86.87,18.29 | 17.02,19.56 J1.3
3.3V1  (via drill 0.38)
  Top 0.178: R18.2 156,28.87 155.96,28.83 v155.96,28.45 | v147.82,28.45 146.81,28.45 146.18,27.81 146.18,23.74 147.25,22.66 148.55,22.66 150.39,20.83
  Top 0.203: R12.1 148.08,30.99 147.82,30.73 147.82,29.08 | 147.82,29.08 v147.82,28.45 U1.1 | C1.1 147.82,29.08 | 150.39,20.83 J11.2 | v164.85,19.56 161.04,15.75 141.62,15.75 140.47,14.61 140.47,9.4 D6.A | I2C1.2 v110.24,19.56 | R23.2 126.33,57.66 129.29,54.7 K3.3 | R9.2 118.71,28.87 v119.13,28.45 | R24.2 173.32,58.46 173.74,58.04 K4.3
  Top 0.61: J10.2 104.66,20.06 v105.16,19.56 | v177.55,18.29 178.32,19.06 J8.2
  Bottom 0.203: K3.3 129.29,28.45 | K4.3 159.77,24.64
  Bottom 0.61: v105.16,19.56 107.7,19.56 | 107.7,19.56 v110.24,19.56 v119.13,28.45 129.29,28.45 v147.82,28.45 v155.96,28.45 159.77,24.64 v164.85,19.56 167.64,16.76 176.02,16.76 v177.55,18.29 | 107.7,19.56 J7.3
3.3V2  (via drill 0.38)
  Top 0.178: R30.2 65.32,96.69 65.28,96.65 v65.28,96.27 | v57.14,96.27 56.13,96.27 55.5,95.63 55.5,91.55 56.57,90.48 57.87,90.48 59.71,88.65
  Top 0.203: R27.1 57.4,98.81 57.14,98.55 57.14,96.9 | 57.14,96.9 v57.14,96.27 U2.1 | C2.1 57.14,96.9 | 59.71,88.65 J18.2 | v74.17,87.38 70.36,83.57 50.94,83.57 49.8,82.42 49.8,77.22 D12.A | I2C2.2 v19.56,87.38 | R35.2 35.65,125.48 38.61,122.52 K5.3 | R25.2 28.03,96.69 v28.45,96.27 | R36.2 82.64,126.28 83.06,125.86 K6.3
  Top 0.61: J17.2 13.98,87.88 v14.48,87.38 | v86.87,86.11 87.64,86.88 J16.2
  Bottom 0.203: K5.3 38.61,96.27 | K6.3 69.09,92.46
  Bottom 0.61: v14.48,87.38 17.02,87.38 | 17.02,87.38 v19.56,87.38 v28.45,96.27 38.61,96.27 v57.14,96.27 v65.28,96.27 69.09,92.46 v74.17,87.38 76.96,84.58 85.34,84.58 v86.87,86.11 | 17.02,87.38 J15.3
3.3V3  (via drill 0.38)
  Top 0.178: R42.2 156,96.69 155.96,96.65 v155.96,96.27 | v147.82,96.27 146.81,96.27 146.18,95.63 146.18,91.55 147.25,90.48 148.55,90.48 150.39,88.65
  Top 0.203: R39.1 148.08,98.81 147.82,98.55 147.82,96.9 | 147.82,96.9 v147.82,96.27 U3.1 | C3.1 147.82,96.9 | 150.39,88.65 J25.2 | v164.85,87.38 161.04,83.57 141.62,83.57 140.47,82.42 140.47,77.22 D17.A | I2C3.2 v110.24,87.38 | R47.2 126.33,125.48 129.29,122.52 K7.3 | R37.2 118.71,96.69 v119.13,96.27 | R48.2 173.32,126.28 173.74,125.86 K8.3
  Top 0.61: J24.2 104.66,87.88 v105.16,87.38 | v177.55,86.11 178.32,86.88 J23.2
  Bottom 0.203: K7.3 129.29,96.27 | K8.3 159.77,92.46
  Bottom 0.61: v105.16,87.38 107.7,87.38 | 107.7,87.38 v110.24,87.38 v119.13,96.27 129.29,96.27 v147.82,96.27 v155.96,96.27 159.77,92.46 v164.85,87.38 167.64,84.58 176.02,84.58 v177.55,86.11 | 107.7,87.38 J22.3
!RESET  (via drill 0.38)
  Top 0.203: R17.2 59.94,30.14 59.94,27.18 J9.5 58.67,24.64 57.4,23.37 U4.4 | J6.1 24.64,11.13 39.42,25.91 v54.23,25.91
  Bottom 0.203: v54.23,25.91 J9.5
!RESET1  (via drill 0.38)
  Top 0.203: R12.2 150.62,30.14 150.62,27.18 J11.5 149.35,24.64 148.08,23.37 U1.4 | J14.1 115.32,11.13 130.1,25.91 v144.91,25.91
  Bottom 0.203: v144.91,25.91 J11.5
!RESET2  (via drill 0.38)
  Top 0.203: R27.2 59.94,97.96 59.94,95 J18.5 58.67,92.46 57.4,91.19 U2.4 | J21.1 24.64,78.95 39.42,93.73 v54.23,93.73
  Bottom 0.203: v54.23,93.73 J18.5
!RESET3  (via drill 0.38)
  Top 0.203: R39.2 150.62,97.96 150.62,95 J25.5 149.35,92.46 148.08,91.19 U3.4 | J28.1 115.32,78.95 130.1,93.73 v144.91,93.73
  Bottom 0.203: v144.91,93.73 J25.5
ADDR_JUMP
  Top 0.203: U4.6 ADR.1
ADDR_JUMP1
  Top 0.203: U1.6 ADR1.1
ADDR_JUMP2
  Top 0.203: U2.6 ADR2.1
ADDR_JUMP3
  Top 0.203: U3.6 ADR3.1
GND  (via drill 0.38)
  other vias: 53.59,30.99 63.75,29.72 59.94,24.64 81.79,25.4 77.98,24.64 58.39,12.67 80.52,14.48 79.25,25.91 89.41,15.75 33.27,24.64 45.97,24.64
  pour Top (isolate 0.305): 6.86,6.86 97.03,6.86 97.03,32.26 6.86,32.26
  pour Bottom (isolate 0.305): 97.03,6.86 6.86,6.86 6.86,32.26 97.03,32.26
GND1  (via drill 0.38)
  other vias: 144.27,30.99 154.43,29.72 150.62,24.64 172.47,25.4 168.66,24.64 149.07,12.67 171.2,14.48 169.93,25.91 180.09,15.75 123.95,24.64 136.65,24.64
  pour Top (isolate 0.305): 97.54,6.86 187.71,6.86 187.71,32.26 97.54,32.26
  pour Bottom (isolate 0.305): 187.71,6.86 97.54,6.86 97.54,32.26 187.71,32.26
GND2  (via drill 0.38)
  other vias: 53.59,98.81 63.75,97.54 59.94,92.46 81.79,93.22 77.98,92.46 58.39,80.49 80.52,82.3 79.25,93.73 89.41,83.57 33.27,92.46 45.97,92.46
  pour Top (isolate 0.305): 6.86,74.68 97.03,74.68 97.03,100.08 6.86,100.08
  pour Bottom (isolate 0.305): 97.03,74.68 6.86,74.68 6.86,100.08 97.03,100.08
GND3  (via drill 0.38)
  other vias: 144.27,98.81 154.43,97.54 150.62,92.46 172.47,93.22 168.66,92.46 149.07,80.49 171.2,82.3 169.93,93.73 180.09,83.57 123.95,92.46 136.65,92.46
  pour Top (isolate 0.305): 97.54,74.68 187.71,74.68 187.71,100.08 97.54,100.08
  pour Bottom (isolate 0.305): 187.71,74.68 97.54,74.68 97.54,100.08 187.71,100.08
MISO
  Top 0.203: J9.1 59.94,19.56 U4.8
MISO1
  Top 0.203: J11.1 150.62,19.56 U1.8
MISO2
  Top 0.203: J18.1 59.94,87.38 U2.8
MISO3
  Top 0.203: J25.1 150.62,87.38 U3.8
N$1
  Top 0.203: R10.1 143.5,10.64 D6.C
N$2
  Top 0.203: R10.2 141.77,11.34 142.62,12.19 PWR1.2
N$3
  Top 0.203: R5.2 86.02,28.87 88.14,30.99 K2.4
N$4
  Top 0.203: D2.A 71.66,30.59 R4.1
N$5
  pour Bottom (no thermals): 27.18,67.82 23.37,67.82 22.73,67.18 22.73,37.97 23.37,37.34 27.18,37.34 27.81,37.97 27.81,67.18
  pour Top (no thermals): 23.37,67.82 27.18,67.82 27.81,67.18 27.81,37.97 27.18,37.34 23.37,37.34 22.73,37.97 22.73,67.18
N$6
  pour Bottom (no thermals): 18.29,67.82 14.48,67.82 13.84,67.18 13.84,37.97 14.48,37.34 18.29,37.34 18.92,37.97 18.92,67.18
  pour Top (no thermals): 14.48,67.82 18.29,67.82 18.92,67.18 18.92,37.97 18.29,37.34 14.48,37.34 13.84,37.97 13.84,67.18
N$7
  Top 0.203: D1.A 27.21,30.59 R1.1
N$8
  pour Top (no thermals): 67.82,67.82 71.63,67.82 72.26,67.18 72.26,37.97 71.63,37.34 67.82,37.34 67.18,37.97 67.18,67.18
  pour Bottom (no thermals): 71.63,67.82 67.82,67.82 67.18,67.18 67.18,37.97 67.82,37.34 71.63,37.34 72.26,37.97 72.26,67.18
N$9
  pour Bottom (no thermals): 62.74,67.82 58.93,67.82 58.29,67.18 58.29,37.97 58.93,37.34 62.74,37.34 63.37,37.97 63.37,67.18
  pour Top (no thermals): 58.93,67.82 62.74,67.82 63.37,67.18 63.37,37.97 62.74,37.34 58.93,37.34 58.29,37.97 58.29,67.18
N$10
  Top 0.203: R2.2 42,30.57 43.69,32.26 K1.4
N$11
  Top 0.178: D3.K 30.99,65.28 30.99,57.66
  Top 0.203: 32.23,28.84 R2.1 31.46,28.07 30.99,28.07 | 30.99,28.84 D1.C | Q1.3 30.99,28.07 | 30.99,28.07 30.99,28.84 | 30.99,57.66 30.99,28.84
N$12
  Top 0.178: R7.1 33.95,65.7 D3.A
N$13
  Top 0.203: R11.1 52.82,10.64 D11.C
N$14
  Top 0.203: R11.2 51.09,11.34 51.94,12.19 PWR.2
N$15
  Top 0.203: R15.1 21.88,18.29 I2C.3
N$16
  Top 0.203: R14.1 17.23,18.29 I2C.1
N$17
  Top 0.178: D4.K 77.98,51.31 75.44,48.77 75.44,39.88
  Top 0.203: D2.C 75.44,28.84 | Q2.3 75.44,28.84 | 75.44,39.88 75.44,30.61 | 75.44,30.61 75.44,28.84 | R5.1 75.48,30.57 75.44,30.61
N$18
  Top 0.178: 80.94,64.86 80.52,65.28 D4.A
  Top 0.203: R8.1 80.94,64.86
N$19
  Top 0.203: R13.2 132.68,30.57 134.37,32.26 K3.4
N$20
  Top 0.203: D5.A 117.88,30.59 R9.1
N$21
  Top 0.203: R19.2 176.7,28.87 178.82,30.99 K4.4
N$22
  Top 0.203: D7.A 162.33,30.59 R18.1
N$23
  Top 0.203: R22.1 112.56,18.29 I2C1.3
N$24
  Top 0.203: R21.1 107.91,18.29 I2C1.1
N$25
  pour Bottom (no thermals): 117.86,67.82 114.05,67.82 113.41,67.18 113.41,37.97 114.05,37.34 117.86,37.34 118.49,37.97 118.49,67.18
  pour Top (no thermals): 114.05,67.82 117.86,67.82 118.49,67.18 118.49,37.97 117.86,37.34 114.05,37.34 113.41,37.97 113.41,67.18
N$26
  pour Bottom (no thermals): 108.97,67.82 105.16,67.82 104.52,67.18 104.52,37.97 105.16,37.34 108.97,37.34 109.6,37.97 109.6,67.18
  pour Top (no thermals): 105.16,67.82 108.97,67.82 109.6,67.18 109.6,37.97 108.97,37.34 105.16,37.34 104.52,37.97 104.52,67.18
N$27
  pour Top (no thermals): 158.5,67.82 162.31,67.82 162.94,67.18 162.94,37.97 162.31,37.34 158.5,37.34 157.86,37.97 157.86,67.18
  pour Bottom (no thermals): 162.31,67.82 158.5,67.82 157.86,67.18 157.86,37.97 158.5,37.34 162.31,37.34 162.94,37.97 162.94,67.18
N$28
  pour Bottom (no thermals): 153.42,67.82 149.61,67.82 148.97,67.18 148.97,37.97 149.61,37.34 153.42,37.34 154.05,37.97 154.05,67.18
  pour Top (no thermals): 149.61,67.82 153.42,67.82 154.05,67.18 154.05,37.97 153.42,37.34 149.61,37.34 148.97,37.97 148.97,67.18
N$29
  Top 0.178: D8.K 121.67,65.28 121.67,57.66
  Top 0.203: 122.91,28.84 R13.1 122.14,28.07 121.67,28.07 | 121.67,28.84 D5.C | Q3.3 121.67,28.07 | 121.67,28.07 121.67,28.84 | 121.67,57.66 121.67,28.84
N$30
  Top 0.178: R23.1 124.63,65.7 D8.A
N$31
  Top 0.178: D9.K 168.66,51.31 166.12,48.77 166.12,39.88
  Top 0.203: D7.C 166.12,28.84 | Q4.3 166.12,28.84 | 166.12,39.88 166.12,30.61 | 166.12,30.61 166.12,28.84 | R19.1 166.16,30.57 166.12,30.61
N$32
  Top 0.178: 171.62,64.86 171.2,65.28 D9.A
  Top 0.203: R24.1 171.62,64.86
N$33
  Top 0.203: R26.1 52.82,78.46 D12.C
N$34
  Top 0.203: R26.2 51.09,79.16 51.94,80.01 PWR2.2
N$35
  Top 0.203: R28.2 42,98.39 43.69,100.08 K5.4
N$36
  Top 0.203: D10.A 27.21,98.41 R25.1
N$37
  Top 0.203: R31.2 86.02,96.69 88.14,98.81 K6.4
N$38
  Top 0.203: D13.A 71.66,98.41 R30.1
N$39
  Top 0.203: R34.1 21.88,86.11 I2C2.3
N$40
  Top 0.203: R33.1 17.23,86.11 I2C2.1
N$41
  pour Bottom (no thermals): 27.18,135.64 23.37,135.64 22.73,135 22.73,105.79 23.37,105.16 27.18,105.16 27.81,105.79 27.81,135
  pour Top (no thermals): 23.37,135.64 27.18,135.64 27.81,135 27.81,105.79 27.18,105.16 23.37,105.16 22.73,105.79 22.73,135
N$42
  pour Bottom (no thermals): 18.29,135.64 14.48,135.64 13.84,135 13.84,105.79 14.48,105.16 18.29,105.16 18.92,105.79 18.92,135
  pour Top (no thermals): 14.48,135.64 18.29,135.64 18.92,135 18.92,105.79 18.29,105.16 14.48,105.16 13.84,105.79 13.84,135
N$43
  pour Top (no thermals): 67.82,135.64 71.63,135.64 72.26,135 72.26,105.79 71.63,105.16 67.82,105.16 67.18,105.79 67.18,135
  pour Bottom (no thermals): 71.63,135.64 67.82,135.64 67.18,135 67.18,105.79 67.82,105.16 71.63,105.16 72.26,105.79 72.26,135
N$44
  pour Bottom (no thermals): 62.74,135.64 58.93,135.64 58.29,135 58.29,105.79 58.93,105.16 62.74,105.16 63.37,105.79 63.37,135
  pour Top (no thermals): 58.93,135.64 62.74,135.64 63.37,135 63.37,105.79 62.74,105.16 58.93,105.16 58.29,105.79 58.29,135
N$45
  Top 0.178: D14.K 30.99,133.1 30.99,125.48
  Top 0.203: 32.23,96.66 R28.1 31.46,95.89 30.99,95.89 | 30.99,96.66 D10.C | Q5.3 30.99,95.89 | 30.99,95.89 30.99,96.66 | 30.99,125.48 30.99,96.66
N$46
  Top 0.178: R35.1 33.95,133.52 D14.A
N$47
  Top 0.178: D15.K 77.98,119.13 75.44,116.59 75.44,107.7
  Top 0.203: D13.C 75.44,96.66 | Q6.3 75.44,96.66 | 75.44,107.7 75.44,98.42 | 75.44,98.42 75.44,96.66 | R31.1 75.48,98.39 75.44,98.42
N$48
  Top 0.178: 80.94,132.68 80.52,133.1 D15.A
  Top 0.203: R36.1 80.94,132.68
N$49
  Top 0.203: R38.1 143.5,78.46 D17.C
N$50
  Top 0.203: R38.2 141.77,79.16 142.62,80.01 PWR3.2
N$51
  Top 0.203: R40.2 132.68,98.39 134.37,100.08 K7.4
N$52
  Top 0.203: D16.A 117.88,98.41 R37.1
N$53
  Top 0.203: R43.2 176.7,96.69 178.82,98.81 K8.4
N$54
  Top 0.203: D18.A 162.33,98.41 R42.1
N$55
  Top 0.203: R46.1 112.56,86.11 I2C3.3
N$56
  Top 0.203: R45.1 107.91,86.11 I2C3.1
N$57
  pour Bottom (no thermals): 117.86,135.64 114.05,135.64 113.41,135 113.41,105.79 114.05,105.16 117.86,105.16 118.49,105.79 118.49,135
  pour Top (no thermals): 114.05,135.64 117.86,135.64 118.49,135 118.49,105.79 117.86,105.16 114.05,105.16 113.41,105.79 113.41,135
N$58
  pour Bottom (no thermals): 108.97,135.64 105.16,135.64 104.52,135 104.52,105.79 105.16,105.16 108.97,105.16 109.6,105.79 109.6,135
  pour Top (no thermals): 105.16,135.64 108.97,135.64 109.6,135 109.6,105.79 108.97,105.16 105.16,105.16 104.52,105.79 104.52,135
N$59
  pour Top (no thermals): 158.5,135.64 162.31,135.64 162.94,135 162.94,105.79 162.31,105.16 158.5,105.16 157.86,105.79 157.86,135
  pour Bottom (no thermals): 162.31,135.64 158.5,135.64 157.86,135 157.86,105.79 158.5,105.16 162.31,105.16 162.94,105.79 162.94,135
N$60
  pour Bottom (no thermals): 153.42,135.64 149.61,135.64 148.97,135 148.97,105.79 149.61,105.16 153.42,105.16 154.05,105.79 154.05,135
  pour Top (no thermals): 149.61,135.64 153.42,135.64 154.05,135 154.05,105.79 153.42,105.16 149.61,105.16 148.97,105.79 148.97,135
N$61
  Top 0.178: D19.K 121.67,133.1 121.67,125.48
  Top 0.203: 122.91,96.66 R40.1 122.14,95.89 121.67,95.89 | 121.67,96.66 D16.C | Q7.3 121.67,95.89 | 121.67,95.89 121.67,96.66 | 121.67,125.48 121.67,96.66
N$62
  Top 0.178: R47.1 124.63,133.52 D19.A
N$63
  Top 0.178: D20.K 168.66,119.13 166.12,116.59 166.12,107.7
  Top 0.203: D18.C 166.12,96.66 | Q8.3 166.12,96.66 | 166.12,107.7 166.12,98.42 | 166.12,98.42 166.12,96.66 | R43.1 166.16,98.39 166.12,98.42
N$64
  Top 0.178: 171.62,132.68 171.2,133.1 D20.A
  Top 0.203: R48.1 171.62,132.68
OPTO_1
  Top 0.203: R3.1 28.41,25.06 28.57,24.89 30.02,24.89 Q1.1
OPTO_2
  Top 0.203: R6.1 72.86,25.06 73.03,24.89 74.47,24.89 Q2.1
OPTO_3
  Top 0.203: R16.1 119.09,25.06 119.25,24.89 120.7,24.89 Q3.1
OPTO_4
  Top 0.203: R20.1 163.54,25.06 163.7,24.89 165.15,24.89 Q4.1
OPTO_5
  Top 0.203: R29.1 28.41,92.88 28.57,92.71 30.02,92.71 Q5.1
OPTO_6
  Top 0.203: R32.1 72.86,92.88 73.03,92.71 74.47,92.71 Q6.1
OPTO_7
  Top 0.203: R41.1 119.09,92.88 119.25,92.71 120.7,92.71 Q7.1
OPTO_8
  Top 0.203: R44.1 163.54,92.88 163.7,92.71 165.15,92.71 Q8.1
RELAY_CTRL1  (via drill 0.38)
  Top 0.178: v54.23,27.05 37.23,27.05 36.09,25.91 28.03,25.91 R3.2
  Top 0.203: v64.39,22.1 U4.10
  Bottom 0.178: v54.23,27.05 54.35,27.18 63.12,27.18 64.39,25.91 v64.39,22.1
RELAY_CTRL2
  Top 0.178: R6.2 68.67,26.76 65.28,23.37
  Top 0.203: 65.28,23.37 U4.11
RELAY_CTRL3  (via drill 0.38)
  Top 0.178: v144.91,27.05 127.91,27.05 126.76,25.91 118.71,25.91 R16.2
  Top 0.203: v155.07,22.1 U1.10
  Bottom 0.178: v144.91,27.05 145.03,27.18 153.8,27.18 155.07,25.91 v155.07,22.1
RELAY_CTRL4
  Top 0.178: R20.2 159.35,26.76 155.96,23.37
  Top 0.203: 155.96,23.37 U1.11
RELAY_CTRL5  (via drill 0.38)
  Top 0.178: v54.23,94.87 37.23,94.87 36.09,93.73 28.03,93.73 R29.2
  Top 0.203: v64.39,89.92 U2.10
  Bottom 0.178: v54.23,94.87 54.35,95 63.12,95 64.39,93.73 v64.39,89.92
RELAY_CTRL6
  Top 0.178: R32.2 68.67,94.58 65.28,91.19
  Top 0.203: 65.28,91.19 U2.11
RELAY_CTRL7  (via drill 0.38)
  Top 0.178: v144.91,94.87 127.91,94.87 126.76,93.73 118.71,93.73 R41.2
  Top 0.203: v155.07,89.92 U3.10
  Bottom 0.178: v144.91,94.87 145.03,95 153.8,95 155.07,93.73 v155.07,89.92
RELAY_CTRL8
  Top 0.178: R44.2 159.35,94.58 155.96,91.19
  Top 0.203: 155.96,91.19 U3.11
SCL/SCK  (via drill 0.38)
  Top 0.203: J9.3 59.94,22.1 61.21,22.1 62.48,20.83 U4.9 72.71,20.83 75.12,23.24 87.79,23.24 89.97,21.06 J2.4 | J1.1 22.1,14.1 v22.48,14.48 22.73,14.73 R15.2 | J3.4 13.18,18.06 16.76,14.48 v18.56,14.48
  Bottom 0.203: J9.3 31.37,23.37 v22.48,14.48 v18.56,14.48
SCL/SCK1  (via drill 0.38)
  Top 0.203: J11.3 150.62,22.1 151.89,22.1 153.16,20.83 U1.9 163.38,20.83 165.8,23.24 178.47,23.24 180.65,21.06 J8.4 | J7.1 112.78,14.1 v113.16,14.48 113.41,14.73 R22.2 | J10.4 103.86,18.06 107.44,14.48 v109.24,14.48
  Bottom 0.203: J11.3 122.05,23.37 v113.16,14.48 v109.24,14.48
SCL/SCK2  (via drill 0.38)
  Top 0.203: J18.3 59.94,89.92 61.21,89.92 62.48,88.65 U2.9 72.71,88.65 75.12,91.06 87.79,91.06 89.97,88.88 J16.4 | J15.1 22.1,81.92 v22.48,82.3 22.73,82.55 R34.2 | J17.4 13.18,85.88 16.76,82.3 v18.56,82.3
  Bottom 0.203: J18.3 31.37,91.19 v22.48,82.3 v18.56,82.3
SCL/SCK3  (via drill 0.38)
  Top 0.203: J25.3 150.62,89.92 151.89,89.92 153.16,88.65 U3.9 163.38,88.65 165.8,91.06 178.47,91.06 180.65,88.88 J23.4 | J22.1 112.78,81.92 v113.16,82.3 113.41,82.55 R46.2 | J24.4 103.86,85.88 107.44,82.3 v109.24,82.3
  Bottom 0.203: J25.3 122.05,91.19 v113.16,82.3 v109.24,82.3
SDA/MOSI  (via drill 0.38)
  Top 0.203: U4.7 56,19.56 v55.75,19.31 v55.75,19.3 55.75,19.18 56.64,18.29 70.74,18.29 74.93,22.48 86.49,22.48 88.91,20.06 J2.3 | v19.56,10.03 19.56,15.75 19.05,16.26 15.75,16.26 15.33,16.68 15.33,17.44 | R14.2 15.33,17.44 | J3.3 13.71,19.06 15.33,17.44
  Bottom 0.203: J1.2 v19.56,10.03 25.83,16.3 47.75,16.3 50.75,19.3 v55.75,19.3 58.42,19.3 61.21,22.1 J9.4
SDA/MOSI1  (via drill 0.38)
  Top 0.203: U1.7 146.68,19.56 v146.43,19.31 v146.43,19.3 146.43,19.18 147.32,18.29 161.42,18.29 165.61,22.48 177.16,22.48 179.59,20.06 J8.3 | v110.24,10.03 110.24,15.75 109.73,16.26 106.43,16.26 106.01,16.68 106.01,17.44 | R21.2 106.01,17.44 | J10.3 104.39,19.06 106.01,17.44
  Bottom 0.203: J7.2 v110.24,10.03 116.51,16.3 138.43,16.3 141.43,19.3 v146.43,19.3 149.1,19.3 151.89,22.1 J11.4
SDA/MOSI2  (via drill 0.38)
  Top 0.203: U2.7 56,87.38 v55.75,87.13 v55.75,87.12 55.75,87 56.64,86.11 70.74,86.11 74.93,90.3 86.49,90.3 88.91,87.88 J16.3 | v19.56,77.85 19.56,83.57 19.05,84.07 15.75,84.07 15.33,84.49 15.33,85.26 | R33.2 15.33,85.26 | J17.3 13.71,86.88 15.33,85.26
  Bottom 0.203: J15.2 v19.56,77.85 25.83,84.12 47.75,84.12 50.75,87.12 v55.75,87.12 58.42,87.12 61.21,89.92 J18.4
SDA/MOSI3  (via drill 0.38)
  Top 0.203: U3.7 146.68,87.38 v146.43,87.13 v146.43,87.12 146.43,87 147.32,86.11 161.42,86.11 165.61,90.3 177.16,90.3 179.59,87.88 J23.3 | v110.24,77.85 110.24,83.57 109.73,84.07 106.43,84.07 106.01,84.49 106.01,85.26 | R45.2 106.01,85.26 | J24.3 104.39,86.88 106.01,85.26
  Bottom 0.203: J22.2 v110.24,77.85 116.51,84.12 138.43,84.12 141.43,87.12 v146.43,87.12 149.1,87.12 151.89,89.92 J25.4

## Text on the board
Bottom: v11 | v11 | v11 | v11
Dimension: Route Out | Route Out | Route Out | Route Out | Route Out | Route Out | Route Out | Route Out | Route Out | Route Out | Route Out | Route Out
Milling: v-score | v-score | v-score | v-score | v-score | v-score